# Altium PCB DOG.PcbDoc
Units mm, origin at the board's own origin, x right, y up, seen from the top; angles counter-clockwise.
Board outline 115.44 x 88.01 mm, 2 copper layers (Top Layer, Bottom Layer); 80 components, 48 nets, 198 pads, 29 vias.
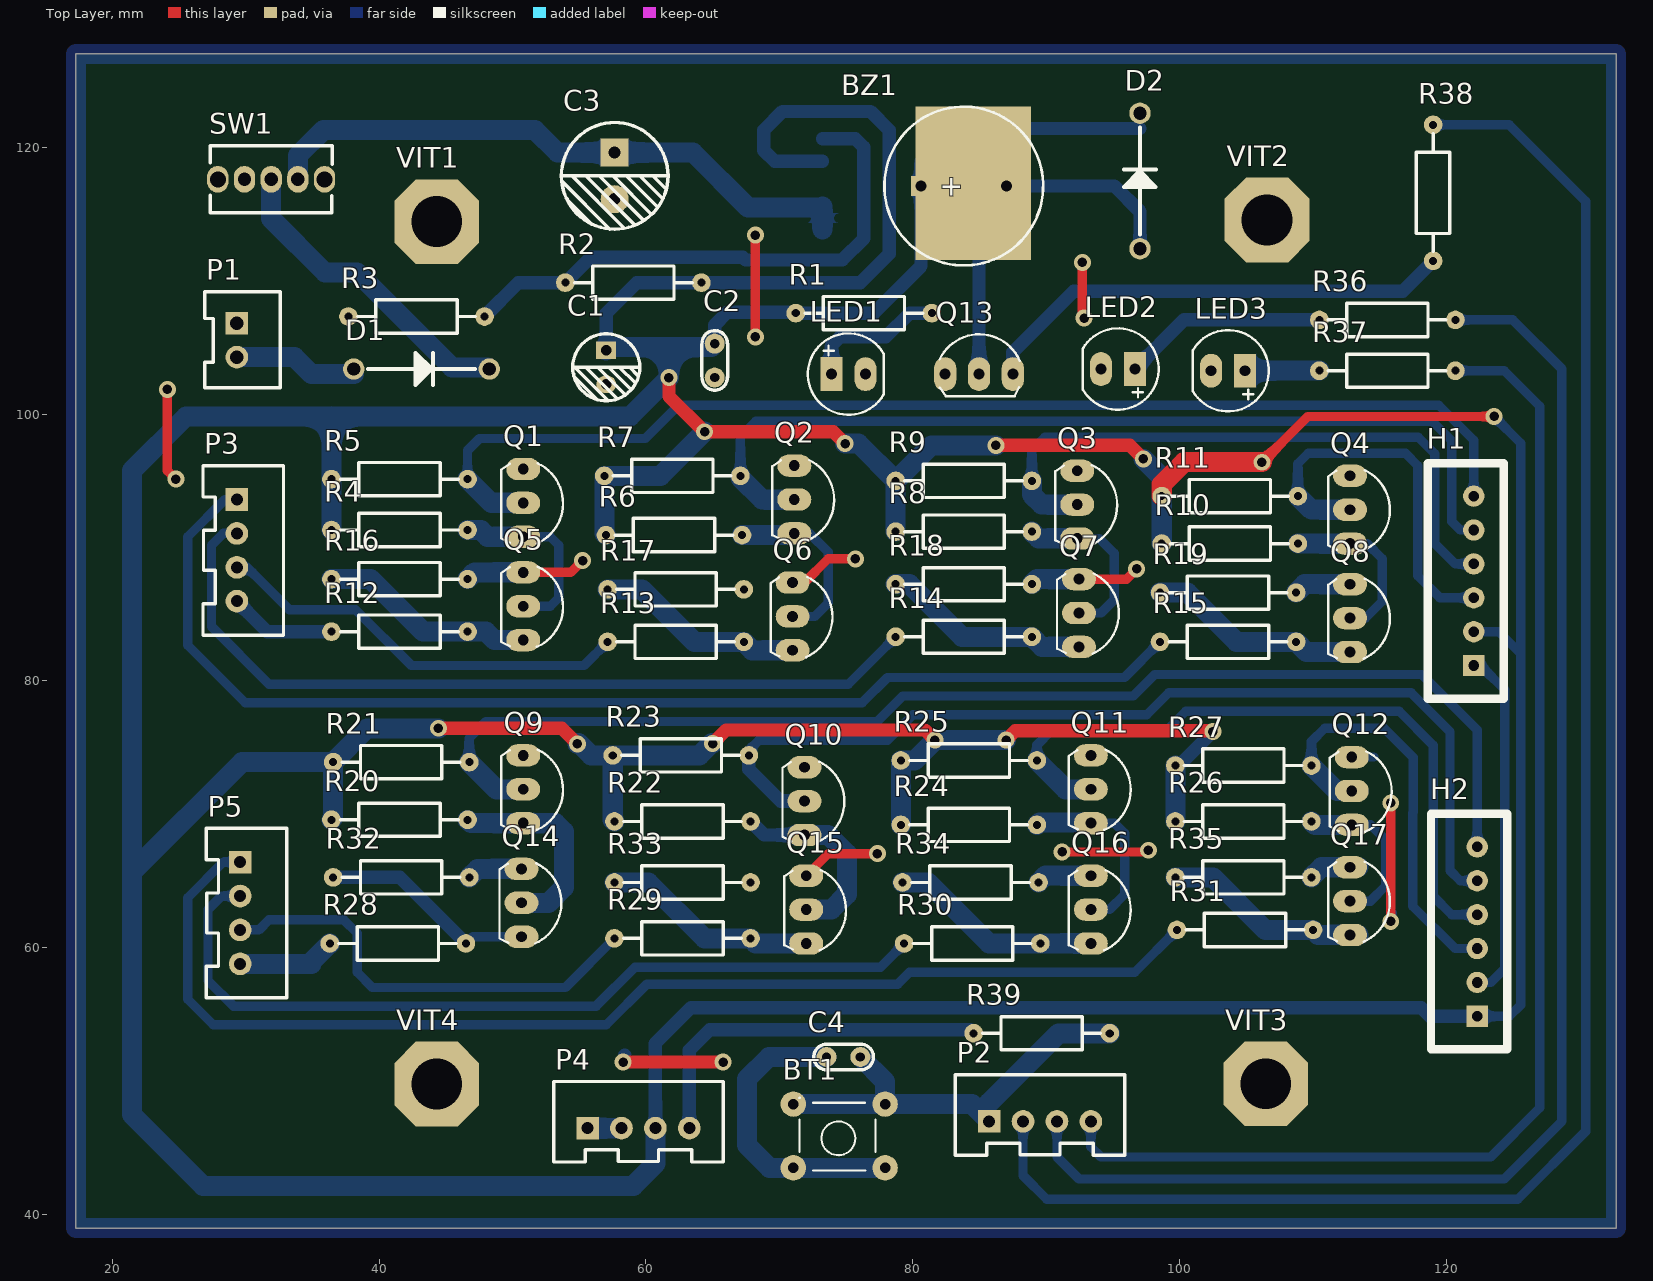
[diagram p0: Top Layer view]
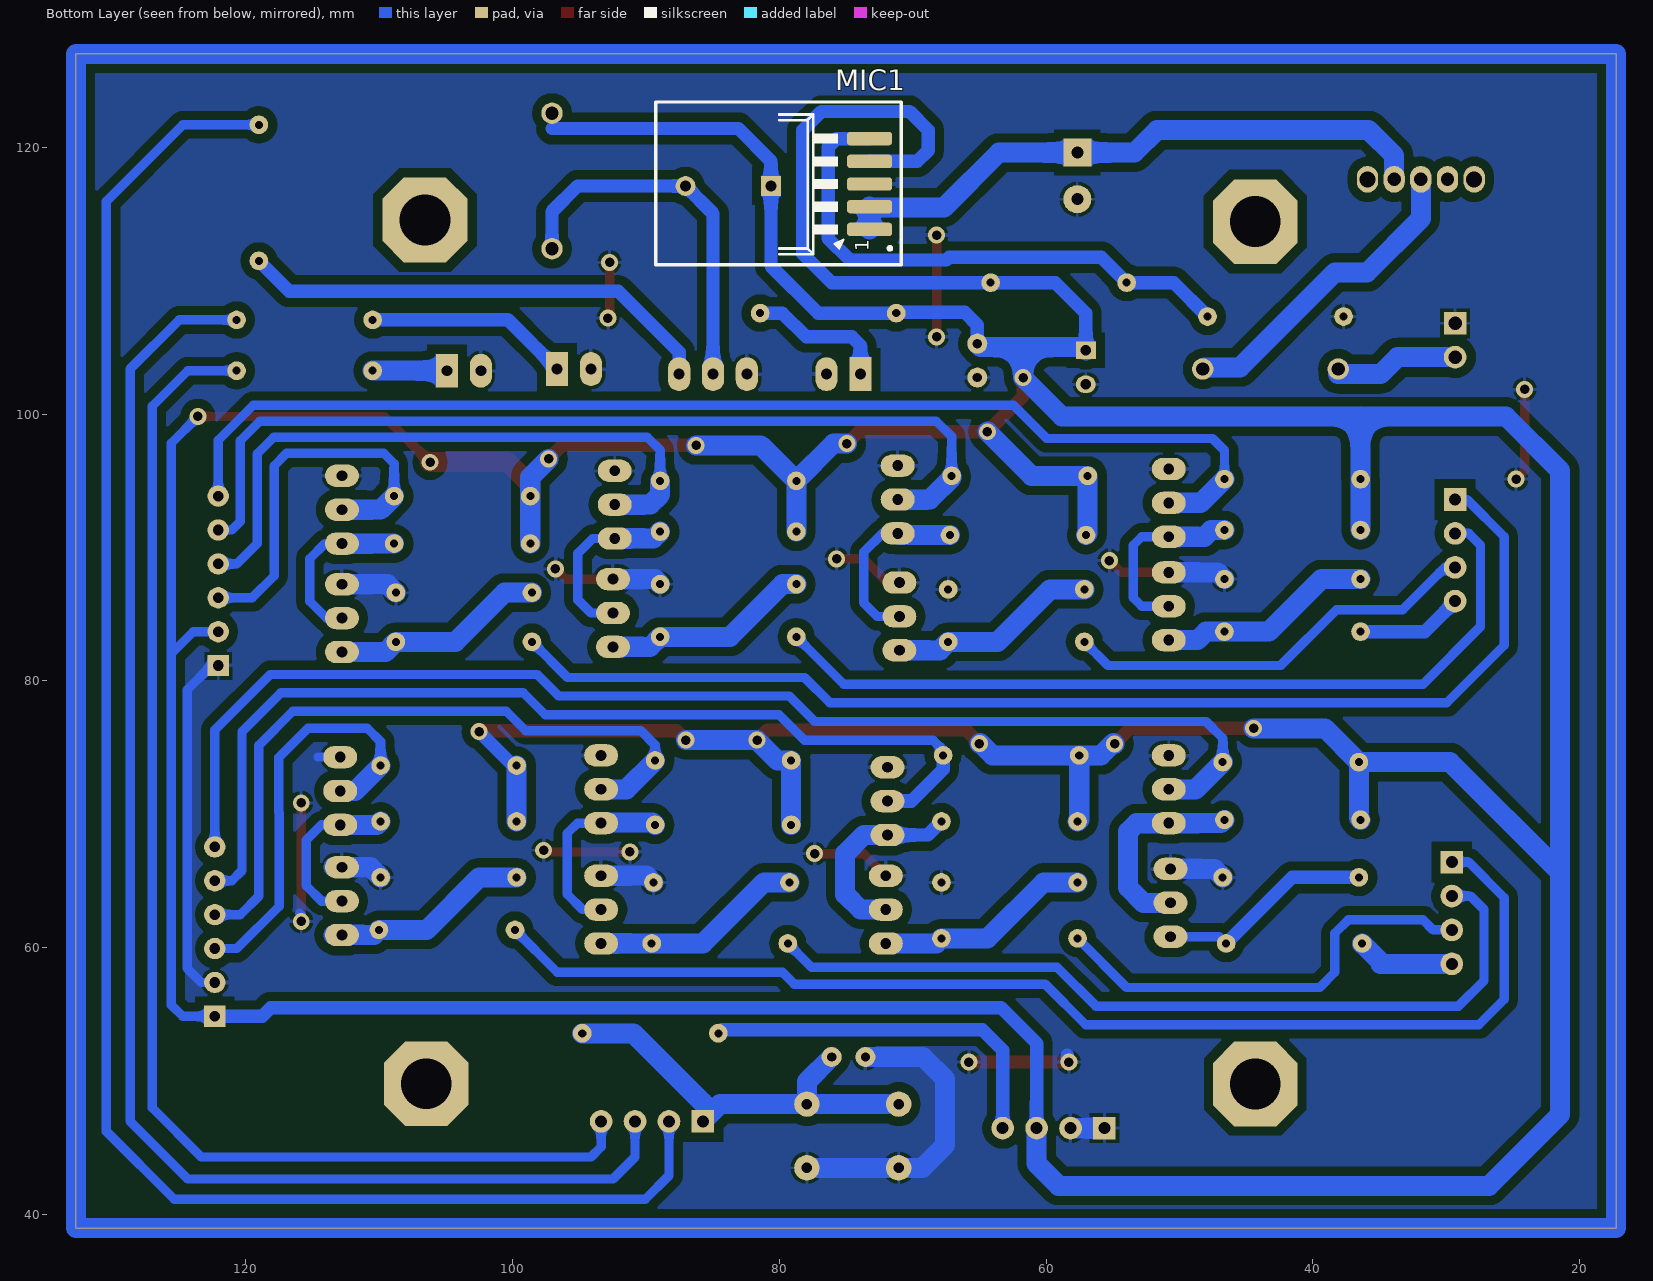
[diagram p1: Bottom Layer view, seen from below]
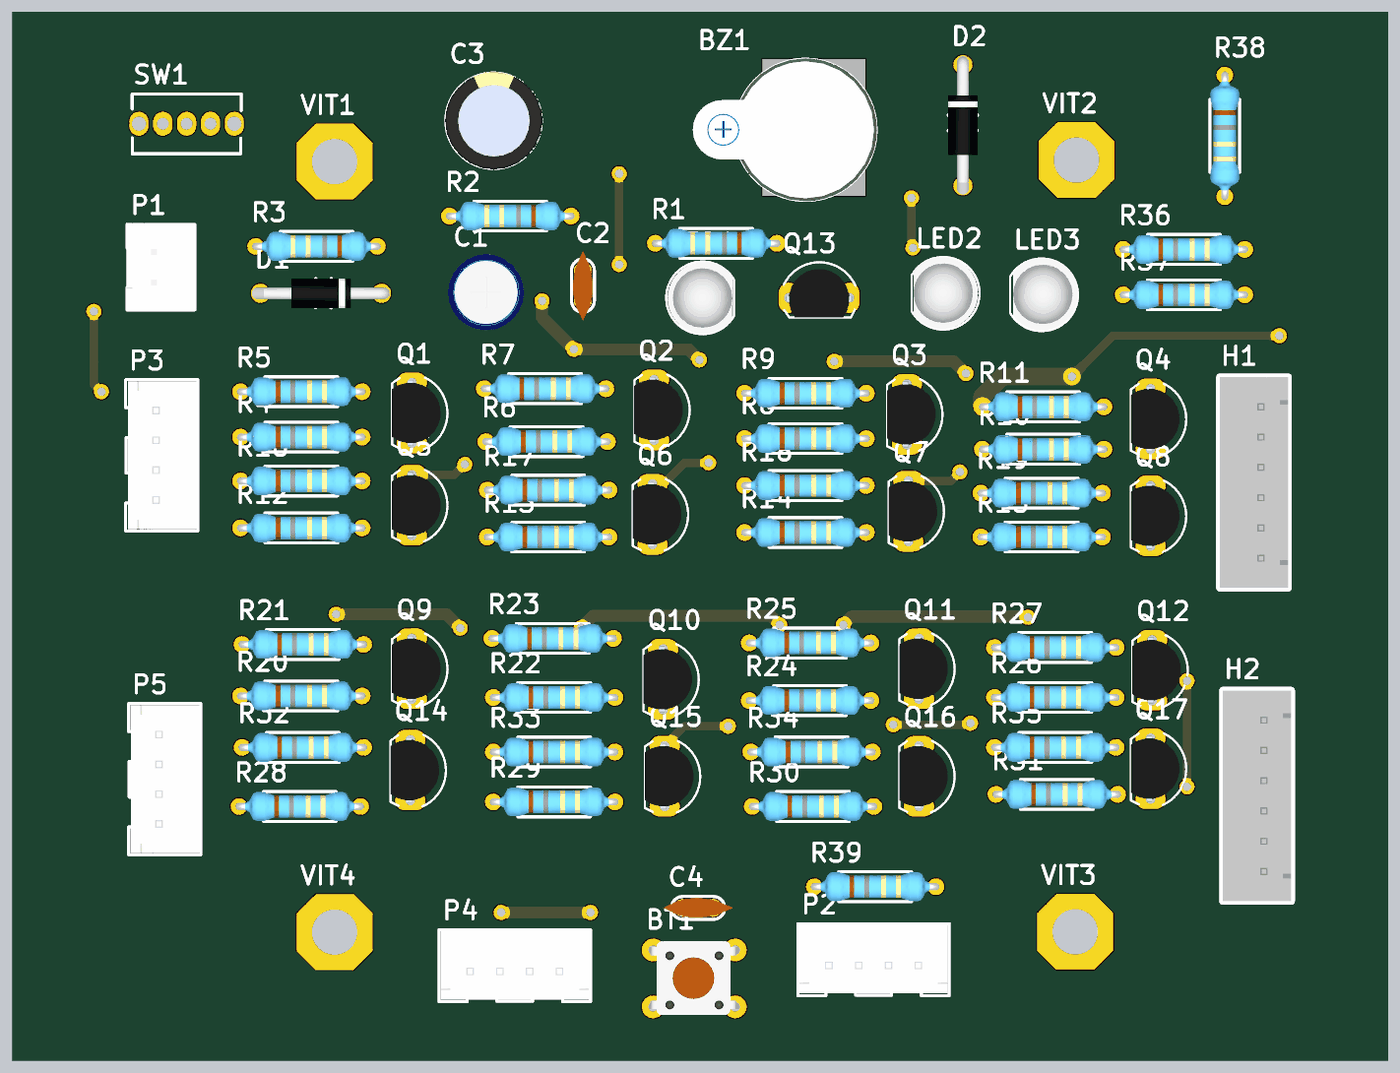
[diagram p2: 3D render of the assembled board from above, using the file's embedded part models]

## Layer stack, top to bottom
Top Solder: solder mask 0.0102, Solder Resist, Dk 3.5
Top Layer: signal copper 0.0356
Dielectric 1: dielectric 0.32, FR-4, Dk 4.8
Bottom Layer: signal copper 0.0356
Bottom Solder: solder mask 0.0102, Solder Resist, Dk 3.5

## Board outline
17.272,38.989 17.272,127 132.715,127 132.715,38.989

## Design rules (kind name [scope] priority, off if disabled: settings)
Clearance [All] p1: gap=0.7 ignorepadtopadclearanceinfootprint=FALSE
PolygonConnect [All] p1: connectstyle=Relief reliefconductorwidth=0.254 reliefentries=4 polygonreliefangle="90 Angle" airgapwidth=0.254
RoutingVias [All] p1: holewidth=0.711 width=1.27 viastyle="Through Hole" minholewidth=0.711 minwidth=1.27 maxholewidth=0.711 maxwidth=1.27
SolderMaskExpansion [All] p1: expansion=0.102
Width [All] p1: maxlimit=1.5 minlimit=0.7 preferedwidth=1
30 further rules are at their usual default settings.

## Components (designator, comment, footprint, x,y, rotation, side; value= is the part's Value field where it differs from the comment)
BT1 "NÚT NHÂN" "Nut Nhan 4 Chan Cam 6x6" 77.597,43.307 r180 top
BZ1 "2Khz" "coi xung" 83.82,117.094 r0 top
C1 "100uF-16V" "tu hoa 5mm" 57.023,103.505 r270 top
C2 "100nF" "tu gom" 65.151,104.013 r270 top
C3 "1000uF-16V" "tu hoa 8mm" 57.658,117.856 r270 top
C4 "10nF" "tu gom" 74.803,51.816 r180 top
D1 "1N4007" 1N4007 43.18,103.378 r0 top
D2 "1N4007" 1N4007 97.028,117.475 r90 top
H1 "11" XH2.54M-6 122.047,81.153 r90 top
H2 "11" XH2.54M-6 122.301,54.864 r90 top
LED1 "LED" LED-5-RED 73.914,102.997 r0 top value="LED 3 ly Single Colour"
LED2 "LED" LED-5-RED 96.647,103.378 r180 top value="LED 3 ly Single Colour"
LED3 "LED" LED-5-Green 104.902,103.251 r180 top value="LED 3 ly Single Colour"
MIC1 "U?" Mic5V 79.756,117.094 r270 bottom
P1 "2.54-2p" "Header Duc Thang 2P 2.54" 29.337,106.807 r0 top
P2 "2.54-4p" "Header Duc Thang 4p 2.54" 89.535,46.99 r180 top
P3 "2.54-4p" "Header Duc Thang 4p 2.54" 29.337,89.789 r90 top
P4 "2.54-4p" "Header Duc Thang 4p 2.54" 59.436,46.482 r180 top
P5 "2.54-4p" "Header Duc Thang 4p 2.54" 29.591,62.611 r90 top
Q1 "C1815" QTO-92 50.8,93.345 r270 top
Q2 "C1815" QTO-92 71.12,93.599 r270 top
Q3 "C1815" QTO-92 92.329,93.218 r270 top
Q4 "C1815" QTO-92 112.776,92.837 r270 top
Q5 "C1815" QTO-92 50.8,85.598 r270 top
Q6 "C1815" QTO-92 70.993,84.836 r270 top
Q7 "C1815" QTO-92 92.456,85.09 r270 top
Q8 "C1815" QTO-92 112.776,84.709 r270 top
Q9 "C1815" QTO-92 50.8,71.882 r270 top
Q10 "C1815" QTO-92 71.882,70.993 r270 top
Q11 "C1815" QTO-92 93.345,71.882 r270 top
Q12 "C1815" QTO-92 112.903,71.755 r270 top
Q13 "C1815" QTO-92 84.963,102.997 r0 top
Q14 "C1815" QTO-92 50.673,63.373 r270 top
Q15 "C1815" QTO-92 72.009,62.865 r270 top
Q16 "C1815" QTO-92 93.345,62.865 r270 top
Q17 "C1815" QTO-92 112.776,63.5 r270 top
R1 "1K" "tro vach 1/4w" 76.327,107.569 r0 top
R2 "4K7" "tro vach 1/4w" 59.055,109.855 r0 top
R3 "1K5" "tro vach 1/4w" 42.799,107.315 r0 top
R4 "10K" "tro vach 1/4w" 41.529,91.313 r180 top
R5 "1K" "tro vach 1/4w" 41.529,95.123 r180 top
R6 "10K" "tro vach 1/4w" 62.103,90.932 r180 top
R7 "1K" "tro vach 1/4w" 61.976,95.377 r180 top
R8 "10K" "tro vach 1/4w" 83.82,91.186 r180 top
R9 "1K" "tro vach 1/4w" 83.82,94.996 r180 top
R10 "10K" "tro vach 1/4w" 103.759,90.297 r180 top
R11 "1K" "tro vach 1/4w" 103.759,93.853 r180 top
R12 "1K" "tro vach 1/4w" 41.529,83.693 r180 top
R13 "1K" "tro vach 1/4w" 62.23,82.931 r180 top
R14 "1K" "tro vach 1/4w" 83.82,83.312 r180 top
R15 "1K" "tro vach 1/4w" 103.632,82.931 r180 top
R16 "10K" "tro vach 1/4w" 41.529,87.63 r180 top
R17 "10K" "tro vach 1/4w" 62.23,86.868 r180 top
R18 "10K" "tro vach 1/4w" 83.82,87.249 r180 top
R19 "10K" "tro vach 1/4w" 103.632,86.614 r180 top
R20 "10K" "tro vach 1/4w" 41.529,69.596 r180 top
R21 "1K" "tro vach 1/4w" 41.656,73.914 r180 top
R22 "10K" "tro vach 1/4w" 62.738,69.469 r180 top
R23 "1K" "tro vach 1/4w" 62.611,74.422 r180 top
R24 "10K" "tro vach 1/4w" 84.201,69.215 r180 top
R25 "1K" "tro vach 1/4w" 84.201,74.041 r180 top
R26 "10K" "tro vach 1/4w" 104.775,69.469 r180 top
R27 "1K" "tro vach 1/4w" 104.775,73.66 r180 top
R28 "1K" "tro vach 1/4w" 41.402,60.325 r180 top
R29 "1K" "tro vach 1/4w" 62.738,60.706 r180 top
R30 "1K" "tro vach 1/4w" 84.455,60.325 r180 top
R31 "1K" "tro vach 1/4w" 104.902,61.341 r180 top
R32 "10K" "tro vach 1/4w" 41.656,65.278 r180 top
R33 "10K" "tro vach 1/4w" 62.738,64.897 r180 top
R34 "10K" "tro vach 1/4w" 84.328,64.897 r180 top
R35 "10K" "tro vach 1/4w" 104.775,65.278 r180 top
R36 "1K" "tro vach 1/4w" 115.57,107.061 r180 top
R37 "1K" "tro vach 1/4w" 115.57,103.251 r180 top
R38 "1K" "tro vach 1/4w" 118.999,116.586 r90 top
R39 "10K" "tro vach 1/4w" 89.662,53.594 r180 top
SW1 "Dip SW" SW3P 35.911,117.553 r270 top
VIT1 "1" VIT 44.323,114.427 r0 top
VIT2 "1" VIT 106.553,114.554 r0 top
VIT3 "1" VIT 106.45,49.808 r0 top
VIT4 "1" VIT 44.323,49.784 r0 top

## Footprints (in the part's own frame and the unit in brackets; to place one, negate y for a bottom-side part, rotate by r counter-clockwise, add the part's x,y. Pads: shape width x height; smd on the part's side, far side on the other; paste and mask are expansions set on the pad)
1N4007 [mm] "DIODE_DIP"
  round 1.6 hole 1 mask+0.1: 1(-5.08,0) 2(5.08,0)
  silkscreen extent -4,-1.2 4,1.21, body extent -5.8,-1.25 5.8,1.25, height 2.75
"coi xung" [mm]
  rect 1.5x1.5 hole 0.8: 1(-3.2,0)
  round 1.5 hole 0.8: 2(3.2,0)
  silkscreen extent -5.95,-5.95 5.95,5.95, body extent -9.45,-6 6,6, height 3.99
"Header Duc Thang 2P 2.54" [mm]
  rect 1.7x1.7 hole 1: 1(0,0)
  round 1.7 hole 1: 2(0,-2.54)
  silkscreen extent -2.41,-4.83 3.25,2.36, body extent -2.47,-4.94 3.33,2.46, height 7
"Header Duc Thang 4p 2.54" [mm]
  rect 1.7x1.7 hole 0.9: 1(3.81,0)
  round 1.7 hole 0.9: 2(1.27,0) 3(-1.27,0) 4(-3.81,0)
  silkscreen extent -6.35,-3.5 6.35,2.54, body extent -6.2,-3.4 6.2,2.35, height 7
LED-5-Green [mil] "LED 2 PIN, 5 ly , Only colour,pin to pin 100mil"
  rect 65x100 hole 32: 1(0,0)
  oval 65x100 hole 32: 2(100,0)
  silkscreen extent -70,-120 154,120, body extent -69,-120 145,117, height 339
LED-5-RED [mil] "LED 2 PIN, 5 ly , Only colour,pin to pin 100mil"
  rect 65x100 hole 32: 1(0,0)
  oval 65x100 hole 32: 2(100,0)
  silkscreen extent -70,-120 154,120, body extent -65,-119 149,118, height 339
Mic5V [mm] "3A"
  rrect50% 1x3.4 smd: 1(3.248,6.528) 2(1.548,6.528) 4(-1.852,6.528) 5(-3.552,6.528)
  rrect50% 1x3.4 smd mask+0: 3(-0.152,6.528)
  rect 11.5x8.634 smd far side: 6(-0.202,-4.774)
  silkscreen extent -6.3,-9.49 5.9,8.91, body extent -5.2,-7.24 4.96,7.4, height 4.57
"Nut Nhan 4 Chan Cam 6x6" [mil] "SW button 4pin, 250 x250 mil"
  round 75 hole 31: 1(-13,-8) 1(258,-8) 2(-13,-196) 2(258,-196)
  silkscreen extent 15,-215 240,0, body extent -31,-225 281,19, height 276
QTO-92 [mil] "TO-92"
  oval 66x100 hole 32: 1(-100,0) 2(0,0) 3(100,0)
  silkscreen extent -117,-65 120,118, body extent -109,-66 109,95, height 245
SW3P [mm]
  oval 2x1.6 hole 1: 1(-0.049,-4.002) 2(-0.049,-2.002) 3(-0.049,-6.002)
  oval 2x1.6 hole 1.2: 4(-0.049,-0.002) 5(-0.049,-8.002)
  silkscreen extent -2.56,-8.57 2.47,0.58, body extent -2.54,-8.51 2.41,0.63, height 8.9
"tro vach 1/4w" [mm]
  round 1.4 hole 0.6: 1(-5.1,0) 2(5.1,0)
  silkscreen extent -4.39,-1.25 4.42,1.25, body extent -5.38,-1.2 5.38,1.2, height 2.41
"tu gom" [mm] "Tu gom mini"
  round 1.5 hole 0.7: 1(-1.27,0) 2(1.27,0)
  silkscreen extent -2.25,-0.97 2.22,0.97, body extent -2.92,-0.85 2.92,0.85, height 6.12
"tu hoa 5mm" [mm]
  rect 1.3x1.5 hole 0.8: 1(-1.27,0)
  oval 1.3x1.5 hole 0.8: 2(1.27,0)
  silkscreen extent -2.51,-2.51 2.51,2.51, body extent -3.12,-3.18 3.23,3.18, height 11.53
"tu hoa 8mm" [mm]
  rect 2.1x2.1 hole 0.9: 1(-1.75,0)
  round 2.1 hole 0.9: 2(1.75,0)
  silkscreen extent -4,-4 4,4, body extent -4.1,-4.07 4.1,4.13, height 14.4
VIT [mm] "VIT"
  oct 6.35x6.35 hole 3.81: VIT1(0,0)
XH2.54M-6 [mm]
  rect 1.6x1.6 hole 0.8: 1(0,0)
  round 1.6 hole 0.8: 2(2.54,0) 3(5.08,0) 4(7.62,0) 5(10.16,0) 6(12.7,0)
  silkscreen extent -2.48,-2.26 15.18,3.46, body extent -2.48,-2.26 15.18,3.48, height 6.91

## Part data
BT1: library part "Nut Nhan 4 Chan Cam 6x6", "Nut Nhan 4 Chan 6x6mm", Ma_Hang=MH004584, Ten="Nút Nh?n 4 Chân 6x6x5MM DIP"
BZ1: library part "Coi xung 2Khz", "C?m", Chung_Loai=C?m, Don_Vi=Con, Ma_Hang=MH007704, Ten_Linh_Kien="Còi Xung 8.5x12MM 16R 2Khz 3-12V"
C1: library part "Tu Hoa 100uF 16V 5x7", "C?m", Chung_Loai=C?m, Don_Vi=Con, Ma_Hang=MH001347, So_Chan=2, Ten_Linh_Kien="T? Hóa 100uF 16V 5x7MM"
C2 C4: library part "Tu gom 20pF 50V", "Cam", Chung_Loai=C?m, Don_Vi=Con, Ma_Hang=MH004768, So_Chan=2, Ten_Linh_Kien="T? g?m 20P 50V"
C3: library part "Tu Hoa 1000uF 16V 8x20", "C?m", Chung_Loai=C?m, Don_Vi=Con, Ma_Hang=MH008300, So_Chan=2, Ten_Linh_Kien="T? Hóa 1000uF 16V 8x20MM"
D1 D2: "Diode LS 1A 1000V DO-41", ComponentLink1Description=Datasheet, ComponentLink1URL="D:\Dropbox\Datasheets\Diodes and Rectifiers\Diodes\1N400X.pdf", Unit Price=0.0072
H1 H2: library part "Header 6P 2.54 Duc Thang", "C?m", Chung_Loai=C?m, Don_Vi=Con, Ma_Hang=MH001972, Ten_Linh_Kien="Header 6P XH2.54-6P Ð?c Th?ng"
LED1 LED2 LED3: "LED Single colour Green and Red"
MIC1: library part Mic5V, "3A"
P1: library part "Header 2.54-2p Duc Thang", "C?m", Chung_Loai=C?m, Don_Vi=Con, Ma_Hang=MH001283, So_Chan=2, Ten_Linh_Kien="Header 2P XH2.54-2P Ð?c Th?ng"
P2 P3 P4 P5: library part "Header 2.54_4p Duc Thang", "C?m", Chung_Loai=C?m, Don_Vi=Con, Ma_Hang=MH001285, So_Chan=4, Ten_Linh_Kien="Header 4P XH2.54-4P Ð?c Th?ng"
Q1 Q2 Q3 Q4 Q5 Q6 Q7 Q8 Q9 Q10 Q11 Q12 Q13 Q14 Q15 Q16 Q17: "NPN 600mW, ECB", =C2383
R1 R2 R3 R4 R5 R6 R7 R8 R9 R10 R11 R12 R13 R14 R15 R16 R17 R18 R19 R20 R21 R22 R23 R24 R25 R26 R27 R28 R29 R30 R31 R32 R33 R34 R35 R36 R37 R38 R39: library part "Tro Vach 1/4W 5% 1k", "C?m", Chung_Loai=C?m, Don_Vi=Con, Ma_Hang=MH007390, So_Chan=2, Ten_Linh_Kien="Tr? V?ch 1/4w 5% 1k"
SW1: library part Switch3P, "Dip Switch 3 pin"
VIT1 VIT2 VIT3 VIT4: library part VIT, "Oc Vit"

## Via types
v1: diameter 1.27, hole 0.711, Top Layer to Bottom Layer, 29 vias

## Nets (pads, with @x,y where several pads share a name; then routed paths per layer and width w, separated by ;. In a path a pad name is that pad's centre, name@x,y a point inside that pad or via, vN(x,y) a via of type N, cw(c..) or ccw(c..) an arc to the next point about the centre after c; other vN are vias at no path point)
3V3: P4.4 R39.2 | length 27.9
  Bottom Layer w1: P4.4 63.246,52.324 64.77,53.848 84.308,53.848 R39.2
+5: BZ1.1 C1.1 C2.1 D2.2 H1.2 H2.1 MIC1.4 P4.3 R1.1 R2.2 R4.2 R5.2 R6.2 R7.2 R8.2 R9.2 R10.2 R11.2 R20.2 R21.2 R22.2 R23.2 R24.2 R25.2 R26.2 R27.2 | length 579.8
  Top Layer w0.7: v1(106.172,96.393) 109.601,99.822 v1(123.571,99.822)
  Top Layer w1: v1(44.45,76.454) 53.696,76.454 v1(54.864,75.286) ; v1(61.722,102.743) 61.722,101.346 v1(64.389,98.679) 74.041,98.679 v1(74.93,97.79) ; v1(64.999,75.311) 66.015,76.327 80.899,76.327 v1(81.661,75.565) ; v1(86.233,97.663) 96.266,97.663 v1(97.282,96.647) ; v1(86.995,75.565) 87.69,76.26 102.429,76.26 v1(102.489,76.2)
  Top Layer w1.5: R11.2 98.659,94.722 100.33,96.393 v1(106.172,96.393)
  Bottom Layer w0.7: H1.2 123.917,83.693 125.568,82.042 ; H2.1 124.714,54.864 125.568,55.718 125.568,82.042 ; v1(123.571,99.822) 125.568,97.825 125.568,82.042
  Bottom Layer w1: C1.1 57.023,107.569 59.309,109.855 R2.2 76.073,109.855 78.232,112.014 78.232,121.285 76.835,122.682 70.231,122.682 68.834,121.285 68.834,119.761 69.649,118.946 MIC1.4 ; P4.3 60.706,52.832 63.373,55.499 118.11,55.499 118.745,54.864 H2.1 ; C2.1 65.151,106.68 66.097,107.626 71.17,107.626 R1.1 77.089,107.569 80.62,111.1 BZ1.1 80.62,118.974 83.058,121.412 97.028,121.412 ; R27.2 99.949,73.66 v1(102.489,76.2)
  Bottom Layer w1.5: R20.2 36.556,69.723 R21.2 ; R4.2 R5.2 36.449,95.143 36.449,99.822 ; v1(44.45,76.454) 39.096,76.454 R21.2 ; v1(54.864,75.286) 54.94,75.362 55.88,74.422 R23.2 ; R6.2 56.876,91.059 R7.2 61.087,95.377 v1(64.389,98.679) ; C1.1 57.277,105.029 61.722,105.029 ; R22.2 57.511,69.596 R23.2 ; P4.3 60.706,43.815 59.055,42.164 26.797,42.164 21.463,47.498 21.463,65.659 ; v1(64.999,75.311) 64.948,75.362 64.008,74.422 R23.2 ; C2.1 64.897,105.029 61.722,105.029 ; v1(74.93,97.79) 75.926,97.79 R9.2 ; R8.2 R9.2 ; R24.2 R25.2 80.137,74.041 v1(81.661,75.565) v1(86.995,75.565) ; v1(86.233,97.663) 81.387,97.663 R9.2 ; v1(97.282,96.647) 98.659,95.27 R11.2 R10.2 ; R26.2 R27.2 ; 21.463,65.659 21.463,95.758 25.527,99.822 36.449,99.822 ; 21.463,65.659 29.718,73.914 R21.2 ; 36.449,99.822 58.801,99.822 v1(61.722,102.743) 61.722,105.029
BTN1: BT1.2 C4.1 P2.1 R39.1 | length 30.7
  Bottom Layer w1.5: BT1.2@71.044,48.285 BT1.2@77.927,48.285 ; C4.1 77.927,49.962 BT1.2@77.927,48.285 ; P2.1 84.43,48.285 BT1.2@77.927,48.285 ; 85.725,48.387 90.932,53.594 R39.1
CHAN1: P3.4 R12.2 | length 8
  Bottom Layer w1: P3.4 31.623,83.693 R12.2
CHAN2: P3.3 R13.2 | length 31.6
  Bottom Layer w0.7: P3.3 30.099,88.519 33.274,85.344 38.227,85.344 42.418,81.153 55.352,81.153 R13.2
CHAN3: P3.2 R14.2 | length 62.9
  Bottom Layer w0.7: P3.2 28.321,91.059 27.432,90.17 27.432,84.074 31.75,79.756 75.164,79.756 R14.2
CHAN4: P3.1 R15.2 | length 89.5
  Bottom Layer w0.7: P3.1 28.448,93.599 25.654,90.805 25.654,82.677 29.972,78.359 76.2,78.359 78.105,80.264 95.865,80.264 R15.2
CHAN5: P5.4 R28.2 | length 7.5
  Bottom Layer w0.7: R28.2@36.28,60.303 R28.2
  Bottom Layer w1.5: P5.4 34.925,58.801 34.925,58.948 36.28,60.303 R28.2@36.302,60.303
CHAN6: P5.3 R29.2 | length 33.7
  Bottom Layer w0.7: P5.3 30.988,61.341 31.75,62.103 37.338,62.103 38.354,61.087 38.354,58.166 39.491,57.029 53.961,57.029 R29.2
CHAN7: P5.2 R30.2 | length 63.1
  Bottom Layer w0.7: P5.2 28.194,63.881 27.178,62.865 27.178,57.531 29.08,55.629 56.264,55.629 59.182,58.547 77.577,58.547 R30.2
CHAN8: P5.1 R31.2 | length 90.5
  Bottom Layer w0.7: P5.1 28.321,66.421 25.654,63.754 25.654,56.134 27.559,54.229 57.023,54.229 60.071,57.277 78.867,57.277 79.756,58.166 96.627,58.166 R31.2
COI: P2.2 R38.2 | length 132.6
  Bottom Layer w0.7: P2.2 88.265,42.926 90.043,41.148 125.349,41.148 130.429,46.228 130.429,115.951 124.694,121.686 R38.2
GND: BT1.1 C1.2 C2.2 C3.2 C4.2 H1.1 H2.2 LED1.2 LED2.2 LED3.2 MIC1.3 P1.1 P4.1 P4.2 Q1.1 Q2.1 Q3.1 Q4.1 Q5.1 Q6.1 Q7.1 Q8.1 Q9.1 Q10.1 Q11.1 Q12.1 Q13.1 Q14.1 Q15.1 Q16.1 Q17.1 R3.1 R16.1 R17.1 R18.1 R19.1 R32.1 R33.1 R34.1 R35.1 | length 142.3
  Top Layer w0.7: v1(24.13,101.854) 24.13,95.758 v1(24.765,95.123) ; Q5.1 54.356,88.138 v1(55.245,89.027) ; v1(68.199,105.791) v1(68.199,113.411) ; Q6.1 71.882,87.376 73.66,89.154 v1(75.692,89.154) ; Q15.1 73.66,67.056 v1(77.343,67.056) ; v1(91.186,67.183) 97.536,67.183 v1(97.663,67.31) ; Q7.1 96.012,87.63 v1(96.774,88.392) ; v1(92.71,111.379) 92.71,107.315 v1(92.837,107.188) ; v1(115.824,61.976) v1(115.824,70.866)
  Top Layer w1: v1(58.293,51.435) v1(65.786,51.435)
  Bottom Layer w0.7: v1(24.765,95.123) v1@24.765,95.25 ; v1@68.072,113.284 v1(68.199,113.411) ; v1@91.059,67.31 v1(91.186,67.183) ; Q12.1 114.554,74.295 ; v1(115.824,61.976) 115.824,62.484 115.951,62.611 ; H1.1 122.555,81.153 124.368,79.34 124.368,58.455 123.317,57.404 H2.2
  Bottom Layer w1: v1(58.293,51.435) 58.42,51.562 v1@58.42,51.943
  Bottom Layer w1.5: R16.1 47.137,88.138 Q5.1 ; R32.1 47.391,65.913 Q14.1 ; P4.1 P4.2 ; C4.2 69.215,51.816 67.564,50.165 67.564,45.212 69.266,43.51 71.044,43.51 BT1.1@77.927,43.51 ; R18.1 89.301,87.63 Q7.1 ; R34.1 89.936,65.405 Q16.1 ; R19.1 109.367,87.249 Q8.1 ; R35.1 110.637,66.04 Q17.1@113.411,66.04
LED1: P2.3 R36.1 | length 108.9
  Bottom Layer w0.7: P2.3 90.805,44.323 92.456,42.672 124.333,42.672 128.651,46.99 128.651,103.378 124.968,107.061 R36.1
LED2: P2.4 R37.1 | length 97.4
  Bottom Layer w0.7: P2.4 93.345,45.085 94.107,44.323 123.317,44.323 127,48.006 127,100.584 124.333,103.251 R37.1
NetBZ1_2: BZ1.2 D2.1 Q13.2 | length 28.5
  Bottom Layer w1: Q13.2 84.963,115.037 BZ1.2 95.123,117.094 97.028,115.189 D2.1
NetC3_1: C3.1 MIC1.1 MIC1.2 SW1.2 | length 46
  Bottom Layer w1.5: SW1.2 33.909,119.38 35.814,121.285 51.689,121.285 53.368,119.606 C3.1 63.528,119.606 67.638,115.496 MIC1.2@73.228,115.496 ; MIC1.1 MIC1.2@73.228,115.496 ; MIC1.2 MIC1.2@73.228,115.496
NetD1_1: D1.1 P1.2 | length 9.3
  Bottom Layer w1.5: P1.2 33.655,104.267 34.925,102.997 D1.1@38.1,102.997
NetD1_2: D1.2 SW1.1 | length 24
  Bottom Layer w1.5: SW1.1 31.909,114.649 35.941,110.617 38.354,110.617 45.466,103.505 48.133,103.505 D1.2
NetLED1_1: LED1.1 R1.2 | length 11.1
  Bottom Layer w1: LED1.1@73.914,102.616 73.914,105.156 74.549,105.791 77.978,105.791 79.756,107.569 R1.2
NetLED2_1: LED2.1 R36.2 | length 15.3
  Bottom Layer w1: LED2.1 100.33,107.061 R36.2
NetLED3_1: LED3.1 R37.2 | length 5.6
  Bottom Layer w1.5: LED3.1 R37.2
NetMIC1_5: MIC1.5 R2.1 R3.2 | length 41.2
  Bottom Layer w1: R3.2 50.439,109.855 R2.1 55.86,111.76 67.255,111.76 67.46,111.555 74.725,111.555 76.327,113.157 76.327,120.015 75.696,120.646 MIC1.5
NetQ1_3: Q1.3 Q5.2 R4.1 | length 14.2
  Bottom Layer w0.7: Q5.2 52.832,85.598 53.467,86.233 53.467,90.17 52.832,90.805 Q1.3
  Bottom Layer w1.5: R4.1 47.625,91.313 48.133,90.805 Q1.3
NetQ2_3: Q2.3 Q6.2 R6.1 | length 14
  Bottom Layer w0.7: Q6.2 72.644,84.836 73.66,85.852 73.66,89.662 72.263,91.059 Q2.3
  Bottom Layer w1.5: R6.1 70.993,90.932 Q2.3
NetQ3_3: Q3.3 Q7.2 R8.1 | length 13.4
  Bottom Layer w0.7: Q3.3 93.98,90.678 95.089,89.569 95.089,86.072 94.107,85.09 Q7.2
  Bottom Layer w1.5: R8.1 89.428,90.678 Q3.3
NetQ4_3: Q4.3 Q8.2 R10.1 | length 12.9
  Bottom Layer w0.7: Q8.2 113.919,84.709 115.189,85.979 115.189,89.154 114.046,90.297 Q4.3
  Bottom Layer w1.5: R10.1 Q4.3
NetQ5_3: Q5.3 R12.1 R16.2 | length 16.3
  Bottom Layer w1.5: R16.2 39.37,87.63 43.307,83.693 R12.1 48.006,83.693 48.641,83.058 Q5.3
NetQ6_3: Q6.3 R13.1 R17.2 | length 15.8
  Bottom Layer w1.5: R17.2 59.69,86.868 63.627,82.931 R13.1 67.965,82.296 Q6.3
NetQ7_3: Q7.3 R14.1 R18.2 | length 15.7
  Bottom Layer w1.5: R18.2 79.756,87.249 83.693,83.312 R14.1 89.682,82.55 Q7.3
NetQ8_3: Q8.3 R15.1 R19.2 | length 16.1
  Bottom Layer w1.5: R19.2 100.584,86.614 104.267,82.931 R15.1 109.494,82.169 Q8.3
NetQ9_3: Q9.3 Q14.2 R20.1 | length 15.4
  Bottom Layer w1.5: R20.1 46.883,69.342 Q9.3 53.213,69.342 53.848,68.707 53.848,64.516 52.705,63.373 Q14.2
NetQ10_3: Q10.3 Q15.2 R22.1 | length 14.8
  Bottom Layer w1: R22.1 68.854,68.453 Q10.3
  Bottom Layer w1.5: Q10.3 73.66,68.453 75.057,67.056 75.057,64.008 73.914,62.865 Q15.2
NetQ11_3: Q11.3 Q16.2 R24.1 | length 14.6
  Bottom Layer w0.7: Q16.2 94.742,62.865 95.885,64.008 95.885,68.58 95.123,69.342 Q11.3
  Bottom Layer w1.5: R24.1 89.481,69.395 93.292,69.395 Q11.3
NetQ12_3: Q12.3 Q17.2 R26.1 | length 12.7
  Bottom Layer w0.7: Q17.2 114.3,63.5 115.443,64.643 115.443,68.072 114.3,69.215 Q12.3
  Bottom Layer w1.5: R26.1 110.129,69.215 Q12.3
NetQ13_3: Q13.3 R38.1 | length 36
  Bottom Layer w1: Q13.3 87.503,104.648 92.075,109.22 116.733,109.22 R38.1
NetQ14_3: Q14.3 R28.1 R32.2 | length 16.7
  Bottom Layer w0.7: R28.1@46.482,60.198 R28.1@46.502,60.218 ; R28.1@46.609,60.325 R28.1@46.502,60.218 ; Q14.3 47.01,60.833 R28.1 R28.1@46.502,60.218
  Bottom Layer w1: R32.2 41.549,65.278 R28.1
NetQ15_3: Q15.3 R29.1 R33.2 | length 16.3
  Bottom Layer w1.5: R33.2 60.198,64.897 64.389,60.706 R29.1 68.219,60.325 Q15.3
NetQ16_3: Q16.3 R30.1 R34.2 | length 16
  Bottom Layer w1.5: R34.2 81.153,64.897 85.725,60.325 R30.1 Q16.3
NetQ17_3: Q17.3 R31.1 R35.2 | length 15.5
  Bottom Layer w1.5: R35.2 102.489,65.278 106.426,61.341 R31.1 110.383,60.96 Q17.3@113.411,60.96
SERVO1: H1.6 Q1.2 R5.1 | length 89.2
  Bottom Layer w0.7: R5.1 46.629,97.282 47.518,98.171 59.944,98.171 62.438,100.665 119.426,100.665 122.047,98.044 H1.6
  Bottom Layer w1.5: R5.1 48.407,93.345 Q1.2
SERVO2: H1.5 Q2.2 R7.1 | length 70.2
  Bottom Layer w0.7: R7.1 67.076,98.318 68.223,99.465 118.929,99.465 120.397,97.997 120.397,91.947 121.031,91.313 H1.5
  Bottom Layer w1.5: R7.1 67.076,95.23 68.707,93.599 Q2.2
SERVO3: H1.4 Q3.2 R9.1 | length 48.5
  Bottom Layer w0.7: R9.1 88.92,97.302 89.883,98.265 117.889,98.265 119.126,97.028 119.126,90.297 120.65,88.773 H1.4
  Bottom Layer w1.5: R9.1 88.92,93.96 89.662,93.218 Q3.2
SERVO4: H1.3 Q4.2 R11.1 | length 29.6
  Bottom Layer w0.7: R11.1 108.859,96.286 109.638,97.065 116.93,97.065 117.856,96.139 117.856,87.884 119.507,86.233 H1.3
  Bottom Layer w1.5: R11.1 109.875,92.837 Q4.2
SERVO5: H2.6 Q9.2 R21.1 | length 94.7
  Bottom Layer w0.7: R21.1 46.756,75.712 48.006,76.962 77.343,76.962 79.248,78.867 96.52,78.867 98.134,80.481 118.147,80.481 122.301,76.327 H2.6
  Bottom Layer w1.5: R21.1 48.788,71.882 Q9.2
SERVO6: H2.5 Q10.2 R23.1 | length 74.9
  Bottom Layer w0.7: R23.1 67.711,74.823 68.453,75.565 78.105,75.565 80.01,77.47 97.536,77.47 99.187,79.121 117.348,79.121 120.269,76.2 120.269,65.786 121.031,65.024 H2.5
  Bottom Layer w1: R23.1 67.711,73.386 70.104,70.993 Q10.2
SERVO7: H2.4 Q11.2 R25.1 | length 53.1
  Bottom Layer w0.7: R25.1 89.301,75.204 90.367,76.27 99.003,76.27 100.457,77.724 116.459,77.724 118.999,75.184 118.999,63.881 120.396,62.484 H2.4
  Bottom Layer w1.5: R25.1 91.46,71.882 Q11.2
SERVO8: H2.3 Q12.2 R27.1 | length 32.4
  Bottom Layer w0.7: R27.1 109.875,75.458 110.871,76.454 115.316,76.454 117.509,74.261 117.509,70.168 117.475,70.134 117.475,63.119 120.65,59.944 H2.3
  Bottom Layer w1.5: R27.1 111.78,71.755 Q12.2 Q12.2@113.411,71.755
pads on no net: MIC1.6 SW1.3 SW1.4 SW1.5 VIT1.VIT1 VIT2.VIT1 VIT3.VIT1 VIT4.VIT1
copper on no net: | length 406.9
  Bottom Layer w1.5: 17.272,38.989 17.272,127 132.715,127 132.715,38.989 17.272,38.989

## Polygon pours and split planes (outlines as drawn)
GND on Bottom Layer "GND_L02_P000" (solid, remove dead copper, pour order 0): 18.161,127 132.715,127 132.715,38.989 18.161,38.989

## Text inside footprints (layer, text, board x,y; h text height)
BZ1: Top Overlay "+" at 82.03,116.383 h1.52
MIC1: Bottom Overlay "1" at 73.279,112.221 h1 r270